# Altium PCB PCB_SensorTapeMaster_v1.PcbDoc
Units mil, origin at the board's own origin, x right, y up, seen from the top; angles counter-clockwise.
Board outline 2220 x 1400 mil, 2 copper layers (Top Layer, Bottom Layer); 56 components, 49 nets, 259 pads, 53 vias.
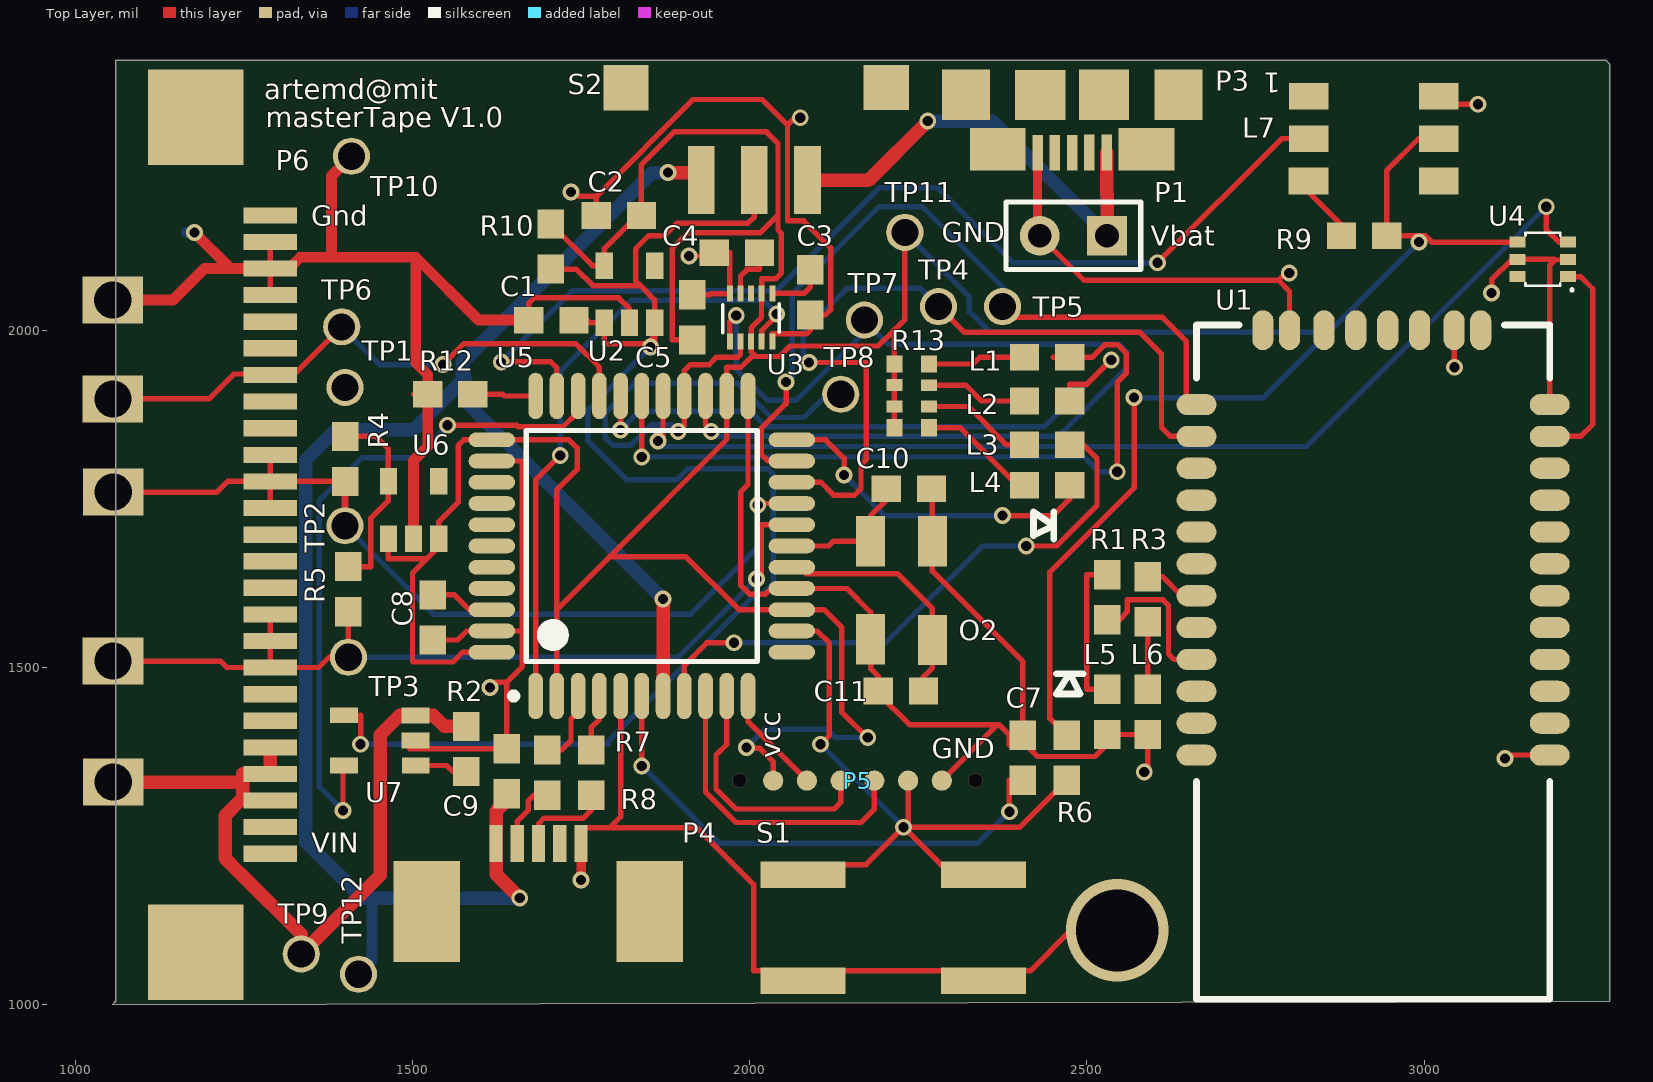
[diagram p0: Top Layer view]
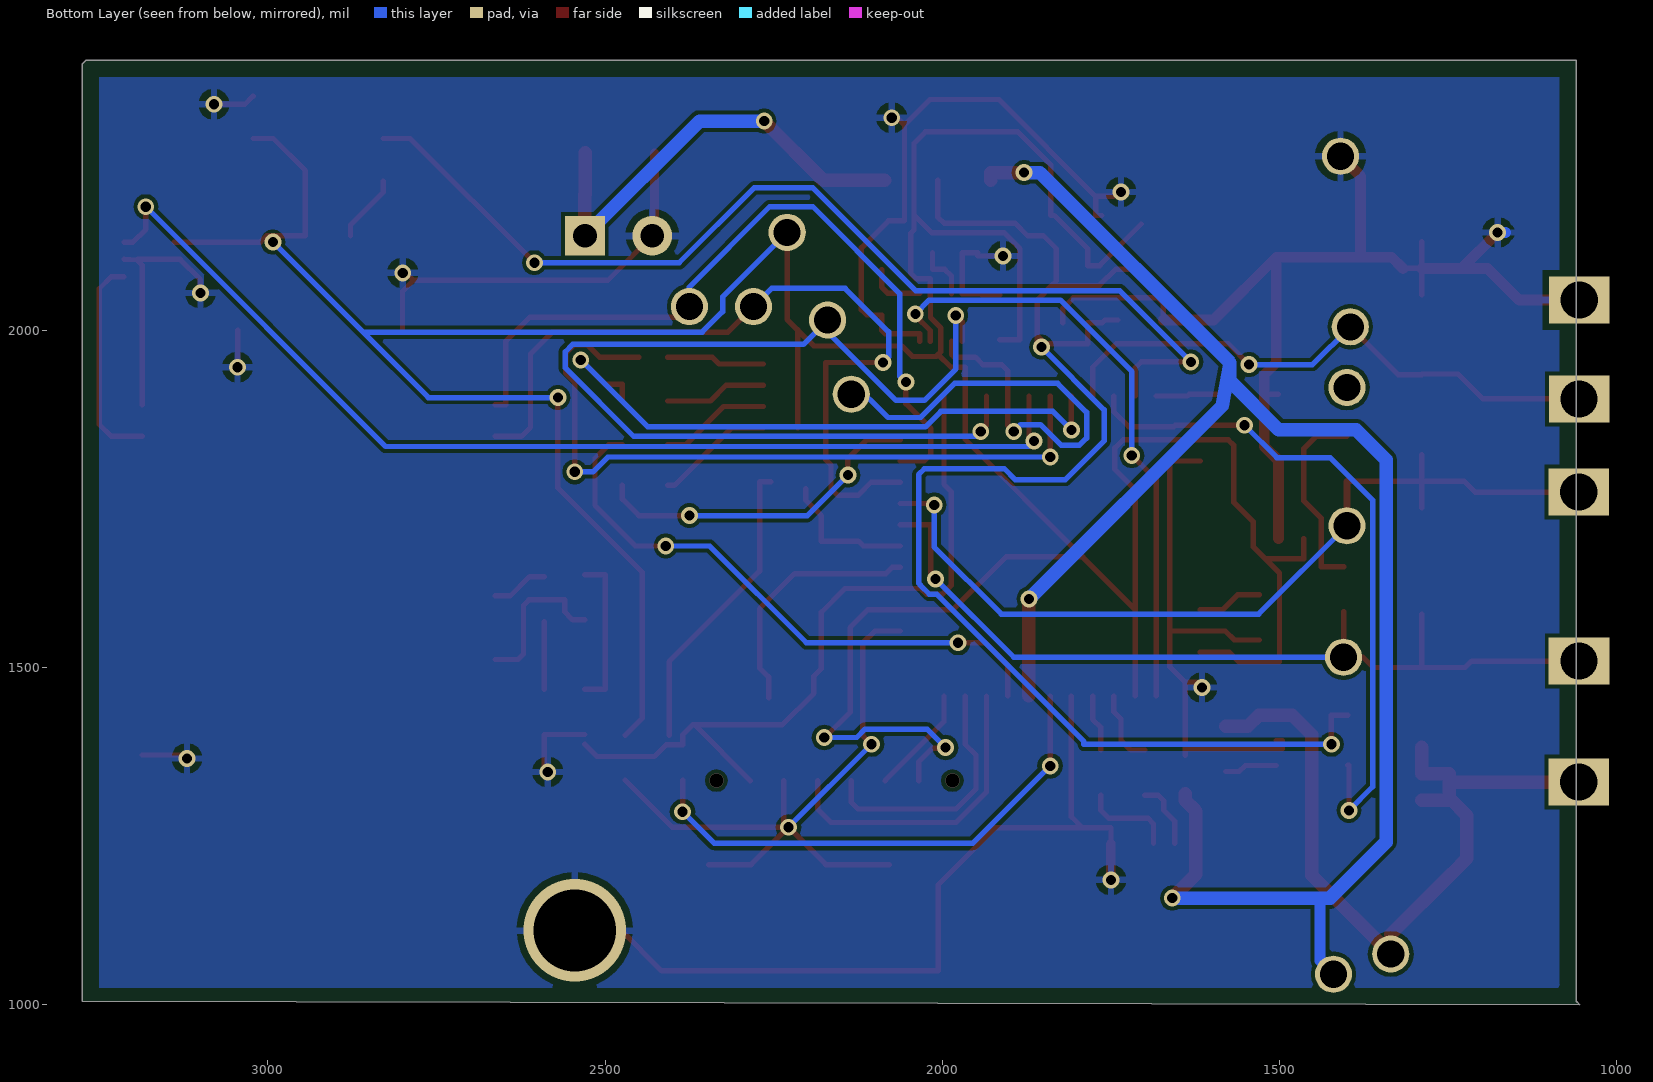
[diagram p1: Bottom Layer view, seen from below]

## Layer stack, top to bottom
Top Solder: solder mask 0.4, Solder Resist, Dk 3.5
Top Layer: signal copper 1.4
Dielectric1: dielectric 12.6, FR-4, Dk 4.8
Bottom Layer: signal copper 1.4
Bottom Solder: solder mask 0.4, Solder Resist, Dk 3.5

## Board outline
1055,1000 1060,1005 1060,2400 3270,2400 3275,2395 3275,1005

## Design rules (kind name [scope] priority, off if disabled: settings)
Clearance [All] p1: gap=6
PolygonConnect [All] p1: connectstyle=Relief reliefconductorwidth=10 reliefentries=4 polygonreliefangle="90 Angle" airgapwidth=10
RoutingVias [All] p1: holewidth=15 width=25 viastyle="Through Hole" minholewidth=15 minwidth=25 maxholewidth=28 maxwidth=50
SolderMaskExpansion [All] p1: expansion=4
Width Width_3 [InNet('VIN')] p1: maxlimit=20 minlimit=16 preferedwidth=20
Width Width_1 [InNet('VBUS')] p2: maxlimit=20 minlimit=16 preferedwidth=20
Width [InNet('VBAT')] p3: maxlimit=20 minlimit=16 preferedwidth=20
Width Width_2 [All] p4: maxlimit=20 minlimit=8 preferedwidth=8
30 further rules are at their usual default settings.

## Components (designator, comment, footprint, x,y, rotation, side; value= is the part's Value field where it differs from the comment)
C1 "10uF" 0603W 1705,2015 r0 top
C2 "10uF" 0603W 1805,2170 r0 top
C3 "0.1uF" 0603W 2090,2055 r90 top
C4 "0.1uF" 0603W 1980,2115 r0 top
C5 "0.1uF" 0603W 1915,2020 r270 top
C7 "1uF 10%" 0603W 2405,1365 r90 top
C8 "0.1uF" 0603W 1530,1575 r270 top
C9 "10uF" 0603W 1640,1345 r90 top
C10 "22pF" 0603W 2235,1765 r0 top
C11 "22pF" 0603W 2225,1465 r180 top
L1 "BLUE" 0603W 2440,1960 r0 top
L2 "RED / ORANGE" 0603W 2440,1895 r0 top
L3 "BLUE" 0603W 2440,1830 r0 top
L4 "BLUE" 0603W 2440,1770 r0 top
L5 "LED" 0603W 2530,1435 r270 top
L6 "LED" 0603W 2590,1435 r270 top
L7 "WS2812" WS2812 3020,2220 r180 top
O2 "16 MHz" CRYSTAL_SMD 2260,1640 r90 top
P1 "Header 2" HDR1X2 2530,2140 r180 top
P3 "microB USB Receptacle" "MicroB USB Standarad SMT" 2510,2235 r180 top
P4 "miniB USB" UX60SC-MB-5ST 1650,1235 r0 top
P5 "6 pin smd 1.27mm female" "6pos 1.27mm" 2290,1645 r0 top
P6 "FPC Connector 25 Pos" "FPC 25 POS" 1295.28,1730.32 r0 top
R1 "1K" 0603W 2530,1605 r270 top
R2 "SHORT" 0603W 1580,1380 r270 top
R3 "1K" 0603W 2590,1600 r90 top
R4 "4.7K" 0603W 1400,1810 r270 top
R5 "4.7K" 0603W 1405,1615 r90 top
R6 "10K" 0603W 2470,1365 r90 top
R7 "22 Ohm 5%" 0603W 1700,1345 r270 top
R8 "22 Ohm 5%" 0603W 1765,1345 r270 top
R9 "1K" 0603W 2910,2140 r0 top
R10 "SHORT" 0603W 1705,2125 r270 top
R12 "10K" 0603W 1555,1905 r0 top
R13 "CHIP RES ARRAY 4" "RES ARRAY 4 1206" 2140,1950 r270 top
S1 "SPST" "EVQQ2 Switch" 2390,1080 r180 top
S2 "ON_OFF_SWITCH" "SS321 Switch" 2085,2220 r270 top
TP1 "Test point small" "Test point small" 1400,1915 r0 top
TP2 "Test point small" "Test point small" 1400,1710 r90 top
TP3 "Test point small" "Test point small" 1405,1515 r90 top
TP4 "Test point small" "Test point small" 2280,2035 r90 top
TP5 "Test point small" "Test point small" 2375,2035 r90 top
TP6 "Test point small" "Test point small" 1395,2005 r90 top
TP7 "Test point small" "Test point small" 2170,2015 r90 top
TP8 "Test point small" "Test point small" 2135,1905 r90 top
TP9 "Test point small" "Test point small" 1335,1075 r90 top
TP10 "Test point small" "Test point small" 1409.45,2257.87 r90 top
TP11 "Test point small" "Test point small" 2230,2145 r90 top
TP12 "Test point small" "Test point small" 1420,1045 r90 top
U1 "" "RN-42 LAND" 2910,1705 r180 top
U2 "DNP" SOT-23-5 1800,2075 r0 top
U3 "MAG3110" 10-VFDFN 2035,2040 r270 top
U4 "SIP32431" SOT363 3175,2105 r180 top
U5 "ATmega32U4-AU" 44ML_N 1840,1680 r90 top
U6 "MIC5205 3.3V REG" SOT-23-5 1480,1755 r0 top
U7 "AP2280 HIGH SIDE SWITCH" SOT25 1550,1365 r90 top

## Footprints (in the part's own frame and the unit in brackets; to place one, negate y for a bottom-side part, rotate by r counter-clockwise, add the part's x,y. Pads: shape width x height; smd on the part's side, far side on the other; paste and mask are expansions set on the pad)
"6pos 1.27mm" [mil]
  round 30 smd paste-30: 1(-255.18,-312.9) 2(-205.22,-312.81) 3(-155.19,-312.82) 4(-105.18,-312.84) 5(-55.15,-312.85) 6(-5.14,-312.83)
10-VFDFN [mm] "3-axis magnetometer"
  round 0.3 on Top Overlay paste-0.05 mask+0.05: 1(-0.778,0.316)
  rect 0.6x0.225 smd paste-0.05 mask+0.05: 1(-0.363,-0.038) 2(-0.362,-0.437) 3(-0.361,-0.837) 4(-0.361,-1.236) 5(-0.361,-1.636) 6(1.438,-1.636) 7(1.438,-1.236) 8(1.437,-0.837) 9(1.437,-0.437) 10(1.435,-0.038)
  silkscreen extent 0.03,-1.91 1.11,0.23, body extent -0.47,-1.84 1.54,0.16, height 1
44ML_N [mm] "Thin QFP, 44-Leads, Body 10x10mm, Pitch 0.8mm, IPC Medium Density"
  oval 1.75x0.55 smd: 1(-5.65,4) 2(-5.65,3.2) 3(-5.65,2.4) 4(-5.65,1.6) 5(-5.65,0.8) 6(-5.65,0) 7(-5.65,-0.8) 8(-5.65,-1.6) 9(-5.65,-2.4) 10(-5.65,-3.2) 11(-5.65,-4) 23(5.65,-4) 24(5.65,-3.2) 25(5.65,-2.4) 26(5.65,-1.6) 27(5.65,-0.8) 28(5.65,0) 29(5.65,0.8) 30(5.65,1.6) 31(5.65,2.4) 32(5.65,3.2) 33(5.65,4)
  oval 0.55x1.75 smd: 12(-4,-5.65) 13(-3.2,-5.65) 14(-2.4,-5.65) 15(-1.6,-5.65) 16(-0.8,-5.65) 17(0,-5.65) 18(0.8,-5.65) 19(1.6,-5.65) 20(2.4,-5.65) 21(3.2,-5.65) 22(4,-5.65) 34(4,5.65) 35(3.2,5.65) 36(2.4,5.65) 37(1.6,5.65) 38(0.8,5.65) 39(0,5.65) 40(-0.8,5.65) 41(-1.6,5.65) 42(-2.4,5.65) 43(-3.2,5.65) 44(-4,5.65)
  silkscreen extent -5.77,-4.35 4.35,4.95, body extent -5,-5 5,5, height 1.2
0603W [mm]
  rect 1.1x1 smd: 1(-0.825,0) 2(0.875,0)
  body extent -0.77,-0.4 0.83,0.4, height 0.8
CRYSTAL_SMD [mm]
  rect 1.9x1.1 smd: 1(-2.525,-0.275) 2(1.2,-0.275) 3(1.2,2.05) 4(-2.5,2.05)
  body extent -3.25,-0.65 2,2.45, height 1
"EVQQ2 Switch" [mm] "Panasonic touch"
  rect 3.2x1 smd: 1(1.1,-2.859) 2(7.902,-2.86) 3(1.1,1.141) 4(7.902,1.14)
  body extent 0.96,-3.97 7.47,2.02, height 2
"FPC 25 POS" [mm] "1mm pitch"
  rect 2x0.61 smd: 1(-0.158,11.173) 2(-0.158,10.172) 3(-0.158,9.17) 4(-0.158,8.169) 5(-0.158,7.168) 6(-0.158,6.167) 7(-0.158,5.165) 8(-0.158,4.164) 9(-0.158,3.153) 10(-0.158,2.152) 11(-0.158,1.15) 12(-0.158,0.149) 13(-0.158,-0.852) 14(-0.158,-1.853) 15(-0.158,-2.854) 16(-0.158,-3.856) 17(-0.158,-4.857) 18(-0.158,-5.858) 19(-0.158,-6.859) 20(-0.158,-7.861) 21(-0.158,-8.862) 22(-0.158,-9.863) 23(-0.158,-10.864) 24(-0.158,-11.866) 25(-0.158,-12.868)
  rect 3.6x3.6 smd: NC(-2.958,-16.575) NC(-2.958,14.875)
HDR1X2 [mm] "Connector; Header; 2 Position"
  rect 1.5x1.5 hole 0.9: 1(0,0)
  round 1.5 hole 0.9: 2(2.54,0)
  silkscreen extent -1.27,-1.27 3.81,1.27
"MicroB USB Standarad SMT" [mm] "FOR ZX Series Hirose"
  rect 0.4x1.35 smd: 1(-0.491,-0.717) 2(0.161,-0.716) 3(0.811,-0.715) 4(1.461,-0.715) 5(2.111,-0.714)
  rect 1.8x1.9 smd: NC(-3.192,-2.89) NC(4.811,-2.889)
  rect 2.1x1.6 smd: NC(-1.991,-0.843) NC(3.611,-0.839)
  rect 1.9x1.9 smd: NC(-0.39,-2.889) NC(2.01,-2.889)
  body extent -2.95,-5.46 4.54,-0.46, height 2.5
"RES ARRAY 4 1206" [mm]
  rect 0.65x0.6 smd: 1(0.005,3.192) 4(2.403,3.193) 5(2.402,1.891) 8(0.004,1.891)
  rect 0.45x0.6 smd: 2(0.804,3.192) 3(1.604,3.192) 6(1.603,1.89) 7(0.803,1.89)
  body extent -0.39,1.7 2.81,3.31, height 0.5
"RN-42 LAND" [mm]
  oval 1.5x0.8 smd: 1(-7.015,8.509) 2(-7.015,7.309) 3(-7.015,6.109) 4(-7.015,4.909) 5(-7.015,3.709) 6(-7.015,2.509) 7(-7.015,1.309) 8(-7.015,0.109) 9(-7.015,-1.091) 10(-7.015,-2.291) 11(-7.015,-3.491) 12(-7.015,-4.691) 13(6.285,-4.691) 14(6.285,-3.491) 15(6.285,-2.291) 16(6.285,-1.091) 17(6.285,0.109) 18(6.285,1.309) 19(6.285,2.509) 20(6.285,3.709) 21(6.285,4.909) 22(6.285,6.109) 23(6.285,7.309) 24(6.285,8.509)
  oval 0.8x1.5 smd: 28(2.785,-7.491) 29(-3.415,-7.491) 30(3.785,-7.491) 31(1.485,-7.491) 32(0.285,-7.491) 33(-0.915,-7.491) 34(-2.115,-7.491) 35(-4.415,-7.491)
  silkscreen extent -7.01,-7.69 6.29,17.71, body extent -7.09,-7.63 6.22,9.56, height 2
SOT25 [mm]
  rect 0.6x1.05 smd: 1(-0.265,1.149) 2(0.677,1.15) 3(1.624,1.153) 4(1.627,3.851) 5(-0.262,3.846)
  body extent -0.73,1.77 1.97,3.25, height 1
SOT363 [mm]
  rect 0.6x0.42 smd: 1(-0.975,0.65) 2(-0.975,0) 3(-0.975,-0.65) 4(0.925,-0.65) 5(0.925,0) 6(0.925,0.65)
  silkscreen extent -1.17,-1 0.62,1.2, body extent -0.67,-1 0.63,1, height 1
SOT-23-5 [mm]
  rect 0.65x1 smd: 1(-0.4,-1.625) 2(0.55,-1.625) 3(1.5,-1.625) 4(1.5,0.525) 5(-0.4,0.525)
  body extent -0.77,-1.68 1.88,0.58, height 1.1
"SS321 Switch" [mm] "SPDT Slide Switch"
  rect 2.55x1 smd: 1(-0.067,-3.987) 2(-0.067,-1.986) 3(-0.067,0.017)
  rect 1.7x1.7 smd: 4(-3.54,-6.813) 5(-3.547,2.985)
  body extent -4.1,-6.54 -0.12,2.65, height 3
"Test point small" [mm]
  round 1.4 hole 1.02: 0(0,0)
UX60SC-MB-5ST [mm] "MiniB USB Connector"
  rect 0.5x1.4 smd: 1(-0.664,0.099) 2(0.136,0.099) 3(0.936,0.099) 4(1.736,0.099) 5(2.536,0.098)
  rect 2.5x3.8 smd: 6(-3.267,-2.466) 7(5.129,-2.469)
  body extent -3.99,-6.29 5.81,0.71, height 2
WS2812 [mm] "RGB Led footprint"
  rect 1.5x1 smd: 1(4.857,-3.229) 2(4.857,-1.629) 3(4.857,-0.029) 4(-0.045,-0.029) 5(-0.045,-1.629) 6(-0.045,-3.229)
  body extent -0.08,-4.13 4.92,0.87, height 1

## Part data
C1 C2 C3 C4 C5 C7 C8 C9 C10 C11: library part Capacitor, "SMD Cap 1206"
L1 L2 L3 L4: library part LED, "LED SMD 1206/0603"
L5 L6: "LED SMD 1206/0603"
O2: library part Crystal_SMD, "Surface mount crystal"
P1: "Header, 2-Pin"
R1 R2 R3 R4 R5 R6 R7 R8 R9 R10 R12: library part Resistor
S1: "THD Button Switch"
S2: "SPDT SMD Side Switch"
U1: library part RN42, "Bluetooth serial modem"
U2 U6: library part MIC5205_VOLTAGE_REG, "5V LDO SMD"
U4: "High side switch"
U5: "8-bit AVR Microcontroller, 2.7-5.5V, 32KB Flash, 2.5KB EEPROM, 1KB SRAM, USB Controller, 44-pin TQFP, Industrial Grade (-40°C to 85°C)"
U7: "2A High side switch"

## Free pads (board coordinates)
  rect 90x70 hole 55: 1(1055.55,2044.68) 1(1055.77,1898.03) 1(1055.85,1509.32) 1(1056.3,1329.92) 1(1056.3,1759.92)

## Via types
v1: diameter 25, hole 15, Top Layer to Bottom Layer, tented both sides, 50 vias
v2: diameter 21, hole 21, Top Layer to Bottom Layer, tented both sides, 2 vias
v3: diameter 152.01, hole 122, Top Layer to Bottom Layer, 1 vias

## Nets (pads, with @x,y where several pads share a name; then routed paths per layer and width w, separated by ;. In a path a pad name is that pad's centre, name@x,y a point inside that pad or via, vN(x,y) a via of type N, cw(c..) or ccw(c..) an arc to the next point about the centre after c; other vN are vias at no path point)
3.3V: R4.1 R5.2 U6.5 | length 290.3
  Top Layer w8: R4.1 1445.77,1842.48 1464.25,1824 U6.5 1464.25,1747.25 1438,1721 1438,1649.45 R5.2
BLUETOOTH_ENABLE: U4.3 U5.27 | length 1610.8
  Top Layer w8: v1(1864.25,1835.75) 1871.5,1843 U5.27 ; v1(3181,2183) 3181,2149.59 3200,2130.59 U4.3
  Bottom Layer w8: v1(1864.25,1835.75) 1872.53,1827.47 2825.47,1827.47 v1(3181,2183)
D+: P4.3 R8.2 | length 138.1
  Top Layer w8: P4.3 1686.87,1268 1695.31,1276.44 1753.44,1276.44 1765,1288 R8.2
D-: P4.2 R7.2 | length 101.9
  Top Layer w8: P4.2 1655.37,1272 1671.37,1288 1671.37,1301.92 1680,1310.55 R7.2
DI: L7.2 U5.32 | length 1554.2
  Top Layer w8: v1(1631.5,1953) 1705.02,1953 1714.02,1944 U5.32 ; v1(2604.86,2100) 2789,2284.14 L7.2
  Bottom Layer w8: v1(1631.5,1953) 1737,2058.5 2039.5,2058.5 2192,2211 2279,2211 2390,2100 v1(2604.86,2100)
EN: U5.31 U7.5 | length 1005.6
  Top Layer w8: v1(1397,1288) 1397,1354.69 U7.5 ; v1(1552,1859) 1655,1859 1657,1857 1723.51,1857 1745.51,1879 U5.31
  Bottom Layer w8: v1(1397,1288) 1362,1323 1362,1748 1425,1811 1504,1811 v1(1552,1859)
GND: C1.1 C2.1 C3.1 C4.1 C5.1 C7.2 C8.2 C9.2 C10.2 C11.2 L5.2 L6.2 L7.6 O2.2 O2.4 P1.2 P3.5 P4.5 P5.6 P6.2 P6.3 P6.4 pad.1@1055.55,2044.68 R12.1 S1.3 S1.4 TP10.0 U1.1 U1.12 U1.28 U1.29 U2.2 U3.5 U3.10 U4.2 U4.5 U5.5 U5.15 U5.23 U5.35 U5.43 U6.2 U7.2 | length 7683.8
  Top Layer w8: P6.4@1289.29,2052.11 1289,2052.11 P6.3@1289,2091.53 ; P6.2@1289.29,2130.95 1289,2130.95 P6.3@1289,2091.53 ; P6.3@1317,2091.53 P6.3@1289,2091.53 ; R12.1@1501.65,1905 R12.1 ; U7.2 1496,1391.64 1496,1379.45 C9.2 ; C8.2 1567,1540.55 1580.46,1554.02 U5.43 1663,1554.02 ; v1(1615,1470) 1623,1478 1640,1478 ; U5.35 1662,1805.98 1663,1804.98 1663,1554.02 ; C9.2@1640,1370 C9.2 ; C1.1 1672.52,2040 1680.52,2048 1805.65,2048 1821.65,2032 U2.2 ; 1746.48,2198.52 1772.52,2198.52 ; P4.5 1749.86,1262 1792,1262 ; C2.1@1763.52,2170 C2.1 1772.52,2198.52 ; U5.5 1808.5,1278.5 1792,1262 ; v1(1910,2110) 1947.52,2110 C4.1 1970.58,2115 U3.5 1942.72,2054.2 1941,2052.48 C5.1 ; U5.23 1997.48,1771.3 1986.99,1760.81 1986.99,1621.51 2000,1608.5 2023.48,1608.5 2031.99,1617.01 U5.15 2144,1617.01 2179.29,1581.72 O2.4 2179.29,1498.26 2190.55,1487 2190.55,1461.58 2237.14,1415 2367.69,1415 ; U3.10 2033.5,1994.5 2084.5,1994.5 2090,2000 C3.1 2112,2022.52 2120,2030.52 2120,2122 2080,2162 2055.96,2162 2055.96,2304 ; v1(2075,2315) 2066.96,2315 2055.96,2304 ; C10.2@2254.45,1775 2270.83,1775 O2.2 2270.83,1642.68 2405,1508.51 C7.2 ; P5.6 2367.69,1415 ; P1.2@2426.89,2140 P1.2 2496,2074 2784,2074 ; L5.2@2530,1385.78 2512.02,1367.79 2426.65,1367.79 2409.45,1385 2385,1385 2385,1399.45 2369.45,1415 2367.69,1415 ; L5.2 L6.2 2590,1350 v1(2585,1345) ; v3(2545,1110) 2475.93,1110 2416,1050.07 2212.04,1050.07 2212,1050.11 2005.89,1050.11 2005.89,1178.11 1922,1262 1792,1262 ; v1(2800,2085) 2795,2085 2784,2074 ; U1.28 2800.35,2057.65 2784,2074 ; L7.6 3033.88,2335 v1(3080,2335) ; U1.29 3044.44,1945.56 v1(3045,1945) ; v1(3100,2055) 3100,2075.05 3129.95,2105 U4.5 3193,2105 3194,2104 ; v1(3120,1365) 3125.02,1370.02 U1.1 ; U1.12 3186,1889.7 3186,2096 3194,2104 ; U4.2 3194,2104 ; C9.2 1640,1478 ; 1640,1478 1663,1501 1663,1554.02 ; 1772.52,2198.52 1916,2342 2017.96,2342 2055.96,2304
  Top Layer w13: P1.2@2426.89,2140 P3.5
  Top Layer w14: P4.5 1750,1238.73 v1(1750,1185)
  Top Layer w16: pad.1@1055.55,2044.68 1144.68,2044.68 1191.53,2091.53 1230,2091.53 ; v1(1176.53,2145) 1230,2091.53 ; P6.3@1289,2091.53 1230,2091.53 ; P6.3@1317,2091.53 1333.47,2108 1380,2108 ; TP10.0 1380,2228.43 1380,2108 ; U6.2 1501.65,1806.65 1522.52,1827.52 R12.1 1522.5,1934.02 1504.76,1951.77 1504.76,2108 ; C1.1 1597.76,2015 1504.76,2108 ; 1380,2108 1504.76,2108
  Bottom Layer w16: v1@1165,2145 v1(1176.53,2145)
  other v1: 1735,2205
INT0: U3.9 U5.1 | length 919.2
  Top Layer w8: U5.1 1682.52,1777.52 v1(1719,1814) ; U3.9 2017.8,1999.11 2040,2021.3 v1(2040,2024)
  Bottom Layer w8: v1(1719,1814) 1719,1938.5 1825,2044.5 2019.5,2044.5 v1(2040,2024)
LED1: L1.2 U5.28 | length 1107.1
  Top Layer w8: v1(1840,1812) U5.28 ; 2450,1960 L1.2 2508.18,1960 2526.68,1978.5 2545.32,1978.5 2558.5,1965.32 2558.5,1936.5 2545,1923 v1(2545,1790)
  Bottom Layer w8: v1(1840,1812) 2496,1812 2518,1790 v1(2545,1790)
LED2: L2.2 U5.29 | length 941.5
  Top Layer w8: v1(1808.5,1852) U5.29 ; L2.2 2474.45,1920 2500,1920 v1(2536,1956)
  Bottom Layer w8: v1(1808.5,1852) 1836,1879.5 2002.16,1879.5 2025.16,1856.5 2436.5,1856.5 v1(2536,1956)
MISO: P5.2 U5.11 | length 161.5
  Top Layer w8: U5.11 1997.48,1419.49 P5.2
MOSI: P5.3 U5.10 | length 377.8
  Top Layer w8: U5.10 1965.98,1385.98 1950,1370 1950,1320 1980,1290 2125,1290 2134.81,1299.81 P5.3
NetC1_2: C1.2 R10.2 S2.2 U2.1 U2.3 U7.4 | length 2135.1
  Top Layer w8: U7.4 1423,1429.06 v1(1423,1386) ; R10.2 1742.75,2090.55 1767.31,2065.98 1838.07,2065.98 ; C1.2 1759,2015 1762.98,2011.02 U2.1 1784.25,1980 1848,1980 1859.06,1991.06 ; v1(1853.06,1975) 1859.06,1981 1859.06,1991.06 ; S2.2 2006.81,2168 1997.5,2158.69 1892.19,2158.69 1873.5,2140 1850,2140 1831,2121 1831,2073.06 1838.07,2065.98 ; 1838.07,2065.98 1859.06,2045 U2.3 1859.06,1991.06
  Bottom Layer w8: v1(1423,1386) 1790,1386 ; 1790,1390 2008.5,1608.5 2019.32,1608.5 2032.5,1621.68 2032.5,1622.5 2035,1625 2035,1786 2026.5,1794.5 1908,1794.5 1892,1778.5 1817.5,1778.5 1760,1836 1760,1881.94 v1(1853.06,1975)
NetC3_2: C3.2 U3.1@2033.49,2054.3 | length 86.4
  Top Layer w8: U3.1@2033.49,2054.3 2033.49,2055 2081,2055 2090,2064 C3.2
NetC4_2: C4.2 U3.4 | length 83
  Top Layer w8: U3.4 1986.32,2080 1996.43,2090.11 2014.45,2090.11 C4.2
NetC7_1: C7.1 U5.6 | length 762.2
  Top Layer w8: v1(1840,1354) U5.6 ; v1(2385,1286) 2385,1332.52
  Bottom Layer w8: v1(1840,1354) 1955,1239 2338,1239 v1(2385,1286)
NetC8_1: C8.1 U5.42 | length 96.7
  Top Layer w8: C8.1 1562,1607.48 1583.97,1585.51 U5.42
NetL1_1: L1.1 R13.1 | length 146
  Top Layer w8: R13.1 2331,1949.82 2341.18,1960 L1.1
NetL2_1: L2.1 R13.2 | length 151.5
  Top Layer w8: R13.2 2320.66,1918.34 2344,1895 L2.1
NetL3_1: L3.1 R13.3 | length 165.4
  Top Layer w8: R13.3 2324.14,1886.86 2381,1830 L3.1
NetL4_1: L4.1 R13.4 | length 177.2
  Top Layer w8: R13.4 2311.59,1855.41 2397,1770 L4.1
NetL5_1: L5.1 R1.1 | length 230
  Top Layer w8: L5.1 2500,1467.48 2500,1637.48 R1.1
NetL6_1: L6.1 R3.1 | length 100
  Top Layer w8: L6.1 R3.1
NetL7_3: L7.3 R9.1 | length 101.3
  Top Layer w8: L7.3 2828.78,2204.74 2877.52,2156 R9.1
NetR1_2: R1.2 U1.21 | length 233.7
  Top Layer w8: R1.2 2548,1570.55 2560,1582.55 2560,1600 2613,1600 2621,1592 2621,1520 2629.25,1511.75 U1.21
NetR2_2: R2.2 U7.1 | length 79
  Top Layer w8: U7.1 1550.74,1354.58 1559.77,1345.55 R2.2
NetR3_2: R3.2 U1.19 | length 84.2
  Top Layer w8: R3.2 2612,1634.45 2640.21,1606.24 U1.19
NetR7_1: R7.1 U5.3 | length 111.2
  Top Layer w8: R7.1 1721,1377.48 1735,1391.48 1735,1423.49 1745.51,1434 U5.3
NetR8_1: R8.1 U5.4 | length 85.1
  Top Layer w8: R8.1 1765,1411 1777.01,1423.01 U5.4
NetR12_2: R12.2 U5.33 | length 94.1
  Top Layer w8: R12.2 1634,1905 1636.56,1902.44 U5.33
NetU1_11: U1.11 U4.1 | length 316.3
  Top Layer w8: U1.11 3232,1842.46 3250,1860.46 3250,2061.41 3232,2079.41 U4.1
P2P_TX: P6.7 pad.1@1055.77,1898.03 TP6.0 U5.30 | length 859.6
  Top Layer w8: pad.1@1055.77,1898.03 1198.03,1898.03 1235,1935 1288.14,1935 1289.29,1933.85 1323.85,1933.85 TP6.0 ; v1(1545,1949) 1576,1980 1742,1980 1777.01,1944.99 U5.30
  Bottom Layer w8: TP6.0 1451,1949 v1(1545,1949)
RESET: P5.5 R6.1 S1.1 S1.2 U5.13 | length 1048.8
  Top Layer w8: U5.13 2099.98,1554.02 2118,1536 2118,1399 v1(2105,1386) ; S1.2@2078.9,1207.61 2172.61,1207.61 v1(2228,1263) ; P5.5 2234.85,1269.85 v1(2228,1263) ; S1.1@2346.7,1207.57 2283.43,1207.57 v1(2228,1263) ; R6.1 2400.48,1263 v1(2228,1263)
  Bottom Layer w8: v1(2105,1386) v1(2228,1263)
RX: TP4.0 U1.14 U5.20 | length 1201.5
  Top Layer w8: U5.20 2105.51,1774.49 2125,1755 2155,1755 2165,1765 2165,1800 2173,1808 2173,1952 v1(2088,1952) ; TP4.0 2318.27,1996.73 2578.77,1996.73 2610.54,1964.96 2610.54,1855.91 2624,1842.46 U1.14
  Bottom Layer w8: v1@2079.56,1960.44 v1(2088,1952) ; 2079.56,1962.56 2079.56,1997.56 2144,2062 2253,2062 TP4.0
RX_LED: L3.2 U5.8 | length 874.4
  Top Layer w8: U5.8 1902.99,1502.99 1936.5,1536.5 v1(1976.5,1536.5) ; v1(2410,1680) 2455,1680 2515,1740 2515,1810 2495,1830 L3.2
  Bottom Layer w8: v1(1976.5,1536.5) 2201.5,1536.5 2344.99,1680 v1(2410,1680)
SCK: P5.4 U5.9 | length 461.8
  Top Layer w8: U5.9 1934.49,1315.51 1980,1270 2165,1270 2184.82,1289.82 P5.4
SCL: P6.16 P6.17 P6.18 pad.1@1055.85,1509.32 R5.1 TP3.0 U5.18 | length 1288.2
  Top Layer w8: pad.1@1055.85,1509.32 1215.39,1509.32 1224.85,1499.85 P6.18@1289,1499.85 ; P6.17@1289.29,1539.27 P6.17@1289,1539.27 ; P6.16@1289.29,1578.69 1289,1578.69 P6.17@1289,1539.27 ; R5.1 TP3.0 1376.15,1515 1361,1499.85 1289.29,1499.85 P6.18@1289,1499.85 ; v1(2010,1631) 2017,1638 2017,1711.5 U5.18 ; P6.18@1289,1499.85 P6.17@1289,1539.27
  Bottom Layer w8: TP3.0 1894,1515 v1(2010,1631)
SCL_AUX: TP8.0 U3.7 U5.26 | length 783.8
  Top Layer w8: v1(1894,1850) 1902.99,1858.99 U5.26 1902.99,1939.99 1912,1949 1940,1949 1951,1960 1982.26,1960 1986.34,1964.07 U3.7
  Bottom Layer w8: v1(1894,1850) 1884,1860 1854.5,1860 1824,1829.5 1796.5,1829.5 1786,1840 1786,1878 1829,1921 1981.65,1921 2032.15,1870.5 2080.5,1870.5 TP8.0@2135,1925
SDA: P6.10 P6.11 P6.12 pad.1@1056.3,1759.92 R4.2 TP2.0 U5.19 | length 1316.6
  Top Layer w8: pad.1@1056.3,1759.92 1209.92,1759.92 1225.79,1775.79 P6.11@1289,1775.79 ; P6.12@1289.29,1736.37 1289,1736.37 P6.11@1289,1775.79 ; P6.10@1289.29,1815.21 1289,1815.21 P6.11@1289,1775.79 ; R4.2 1400,1775.79 1289.29,1775.79 P6.11@1289,1775.79 ; v1(2012,1741) 2013.99,1742.99 U5.19
  Top Layer w10: TP2.0 R4.2
  Bottom Layer w8: TP2.0 1531,1579 1912.29,1579 2012,1678.71 v1(2012,1741)
SDA_AUX: TP7.0 U3.6 U5.25 | length 1540.4
  Top Layer w8: U5.25 1934.49,1858.51 v1(1943,1850) ; U3.6 1970.6,2012.6 v1(1980,2022)
  Bottom Layer w8: v1(1943,1850) 1950.5,1842.5 2457.5,1842.5 2559,1944 2559,1968 2548,1979 2206,1979 TP7.0 2170,1997.5 2068.5,1896 2026.45,1896 1980,1942.45 v1(1980,2022)
TX: TP5.0 U1.13 U5.21 | length 1162.7
  Top Layer w8: v1(2054,1923) 2054,1891 2017,1854 2017,1816 2027.02,1805.98 U5.21 ; TP5.0 2375,2019 2612,2019 2647,1984 2647,1889.7 U1.13
  Bottom Layer w8: v1(2054,1923) 2062.79,1931.79 2062.79,2053.79 2192,2183 2256,2183 2375,2064 TP5.0
TX_LED: L4.2 U5.22 | length 503.9
  Top Layer w8: U5.22 2112.52,1837.48 2140,1810 v1(2140,1785) ; v1(2375,1725) 2450,1725 2474.45,1749.45 L4.2
  Bottom Layer w8: v1(2140,1785) 2200,1725 v1(2375,1725)
VBAT: P1.1 P3.1 S2.3 | length 675.4
  Top Layer w20: S2.3 2085.65,2222 2176,2222 v1(2264,2310) ; P3.1 2529.32,2201.68 2530,2201 P1.1
  Bottom Layer w20: v1(2264,2310) 2360,2310 P1.1
VBUS: C9.1 P4.1 S2.1 TP12.0 U5.7 | length 2618.9
  Top Layer w20: C9.1 1640,1303.13 1623.87,1287 P4.1 1623.87,1193.13 v1(1659,1158) ; U5.7 v1(1871.5,1601.5) ; v1(1878.61,2233.61) 1928.05,2233.61 S2.1
  Bottom Layer w16: TP12.0 1440,1065 1440,1158
  Bottom Layer w20: v1(1659,1158) 1540,1158 1440,1158 1425,1158 1342,1241 1342,1808 1386,1852 1501,1852 1573.52,1924.52 1573.52,1952 ; v1(1871.5,1601.5) 1585,1888 1573.52,1952 ; v1(1878.61,2233.61) 1855.13,2233.61 1573.52,1952
VCC: C2.2 C5.2 L7.5 P5.1 R6.2 R9.2 R10.1 R13.5 R13.6 R13.7 R13.8 TP11.0 U2.5 U3.2 U3.8 U4.4 U5.2 U5.14 U5.24 U5.34 U5.44 U6.1 U6.3 | length 6388.7
  Top Layer w8: U6.1 1464.25,1661 1521,1661 ; U5.44 1574.52,1522.52 1560,1508 1500,1508 1500,1640 1521,1661 ; R10.1 1766.81,2095.67 U2.5 1784.25,2120.55 1833.7,2170 C2.2 1839.45,2245.45 1888,2294 2025,2294 2041.96,2277.04 2041.96,2170.65 ; U5.2 1714.02,1586.03 ; C5.2 1885,1985.55 1885,2121 1908.69,2144.69 2016,2144.69 2041.96,2170.65 ; v1(1995,1381) 1996,1380 2015,1380 2034.82,1360.18 P5.1 ; v1@2175,1395 2136.67,1433.33 2136.67,1558.84 2110,1585.51 U5.14 1984,1585.51 1905.51,1664 1791.98,1664 ; 2214.41,1871.03 R13.6 2214.41,1902 R13.7 2214.41,1934 ; R13.5 2214.44,1871 ; 2214.43,1934.02 R13.8 2214.43,2000.43 ; TP11.0 2230,2016 2214.43,2000.43 ; R6.2 2445,1424.45 2445,1641.25 2570,1766.25 v1(2570,1900) ; v1(2992.59,2130.59) 3002,2140 ; L7.5 2992,2284.13 2944.45,2236.57 R9.2 3002,2140 ; U4.4 3011.41,2130.59 3002,2140 ; 1521,1661 1539.06,1679.06 U6.3 1539.06,1716 1568,1744.94 1568,1829.48 1576,1837.48 U5.34 1732.03,1837.48 1744,1825.51 1744,1793.51 1714.02,1763.53 1714.02,1586.03 ; 1714.02,1586.03 1791.98,1664 ; 1791.98,1664 1965.98,1838 U5.24 1965.98,1945 1987.06,1945 2006.06,1964 ; 2006.06,1964 2002.06,1968 U3.8 2002.06,2003.28 2017.5,2018.71 2017.5,2046.21 2017.79,2046.5 U3.2 2017.79,2076.11 2038.11,2076.11 2047,2085 2047,2143.41 2041.96,2148.45 2041.96,2170.65 ; 2006.06,1964 2009.17,1960.89 2044.39,1960.89 2060.06,1976.56 2190.56,1976.56 2214.43,2000.43
  Bottom Layer w8: v1(1995,1381) 2022.5,1408.5 2114.32,1408.5 2126.82,1396 v1(2175,1396) ; TP11.0 2325.56,2049.44 2325.56,2027.44 2356,1997 2859,1997 ; v1(2570,1900) 2762,1900 2859,1997 ; v1(2992.59,2130.59) 2859,1997
VCCIO: TP1.0
VIN: P6.21 P6.22 P6.23 pad.1@1056.3,1329.92 R2.1 TP9.0 U7.3 | length 1160.9
  Top Layer w20: pad.1@1056.3,1329.92 1248,1329.92 ; P6.23@1289.29,1302.76 1248,1302.76 ; P6.21@1289.29,1381.6 1289.29,1342.18 1248,1342.18 1248,1329.92 ; R2.1 1547,1412.48 1530.53,1428.95 U7.3 1480.95,1428.95 1452,1400 1452,1192 TP9.0 1335,1104.18 1243.47,1195.71 1243.07,1195.71 1222,1216.78 1222,1280 1244.76,1302.76 1248,1302.76 ; 1248,1302.76 1248,1329.92
XTAL1: C10.1 O2.3 U5.17 | length 207.2
  Top Layer w8: U5.17 2117,1680 2124.24,1687.24 O2.3 2179.29,1725 2202.52,1748.23 C10.1
XTAL2: C11.1 O2.1 U5.16 | length 371.4
  Top Layer w8: U5.16 2074,1648.5 2083.5,1639 2218.83,1639 2270.83,1587 O2.1 2270.83,1499.35 2257.48,1486 C11.1@2257.48,1455
pads on no net: L7.1 L7.4 P3.2 P3.3 P3.4 P3.NC P4.4 P4.6 P4.7 P6.1 P6.5 P6.6 P6.8 P6.9 P6.13 P6.14 P6.15 P6.19 P6.20 P6.24 P6.25 P6.NC S2.4 S2.5 U1.2 U1.3 U1.4 U1.5 U1.6 U1.7 U1.8 U1.9 U1.10 U1.15 U1.16 U1.17 U1.18 U1.20 U1.22 U1.23 U1.24 U1.30 U1.31 U1.32 U1.33 U1.34 U1.35 U2.4 U3.1@2047.46,2070.62 U3.3 U4.6 U5.12 U5.36 U5.37 U5.38 U5.39 U5.40 U5.41 U6.4
copper on no net:
  other v2: 1984.92,1332.21 2334.88,1332.12

## Polygon pours and split planes (outlines as drawn)
GND on Bottom Layer "Top Layer-No Net" (solid, remove dead copper, pour order 3): 1080,1025 1085,1030 1085,2375 3250,2375 3250,1025

## Silkscreen, mask and mechanical layers (free items; w line width, h text height)
Top Overlay:
  lines w10: 2450.67,1690.35 2450.67,1730.35 ; 2454.65,1490.67 2494.65,1490.67 ; 2420.67,1695.35 2450.67,1710.35 2420.67,1730.35 2420.67,1695.35 ; 2454.65,1460.67 2489.65,1460.67 2474.65,1490.67 2454.65,1460.67
  text "artemd@mit" at 1280.51,2342.52 h30
  text "masterTape V1.0" at 1282.48,2301.18 h30
  text "Gnd" at 1350,2155 h30
  text "GND" at 2285,2130 h30
  text "Vbat" at 2595,2125 h30
  text "vcc" at 2045,1365 h30 r90
  text "GND" at 2270,1365 h30
  text "VIN" at 1350,1225 h30
Mechanical 1:
  lines w12: 3269.3,2405.7 1065.7,2405.7 1060,2400 1060,995 3275,995 3275,2400

## Text inside footprints (layer, text, board x,y; h text height)
L7: Top Overlay "1" at 2787.21,2382.04 h30 r180